# EAGLE board SparkFun_FreeSoC2_Panel_v14 (EAGLE 7.5.0), part 1 of 6
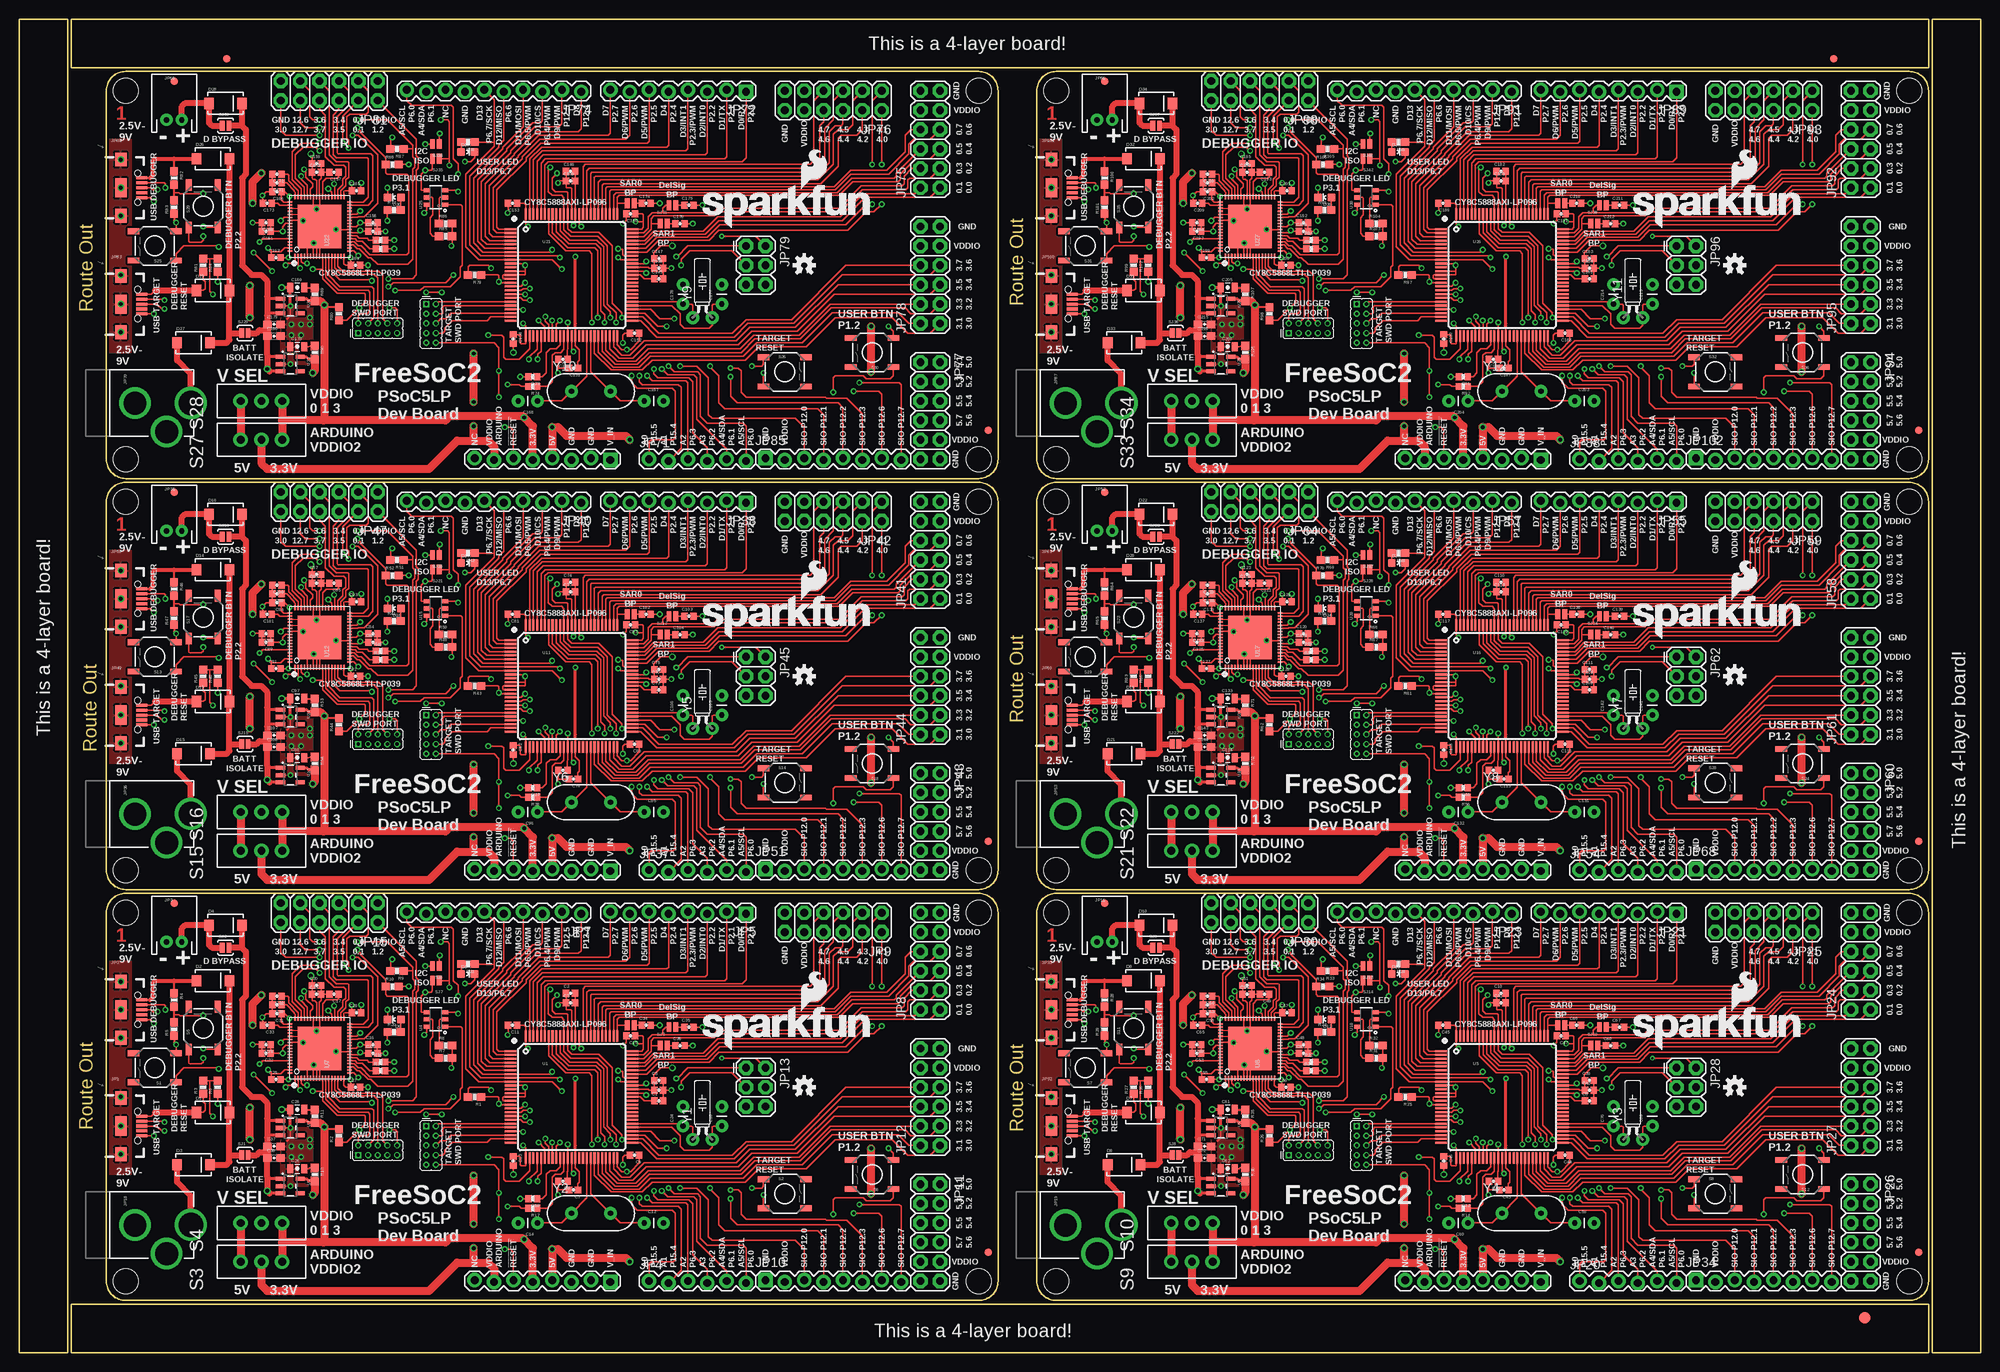
[diagram p0: board, top side]
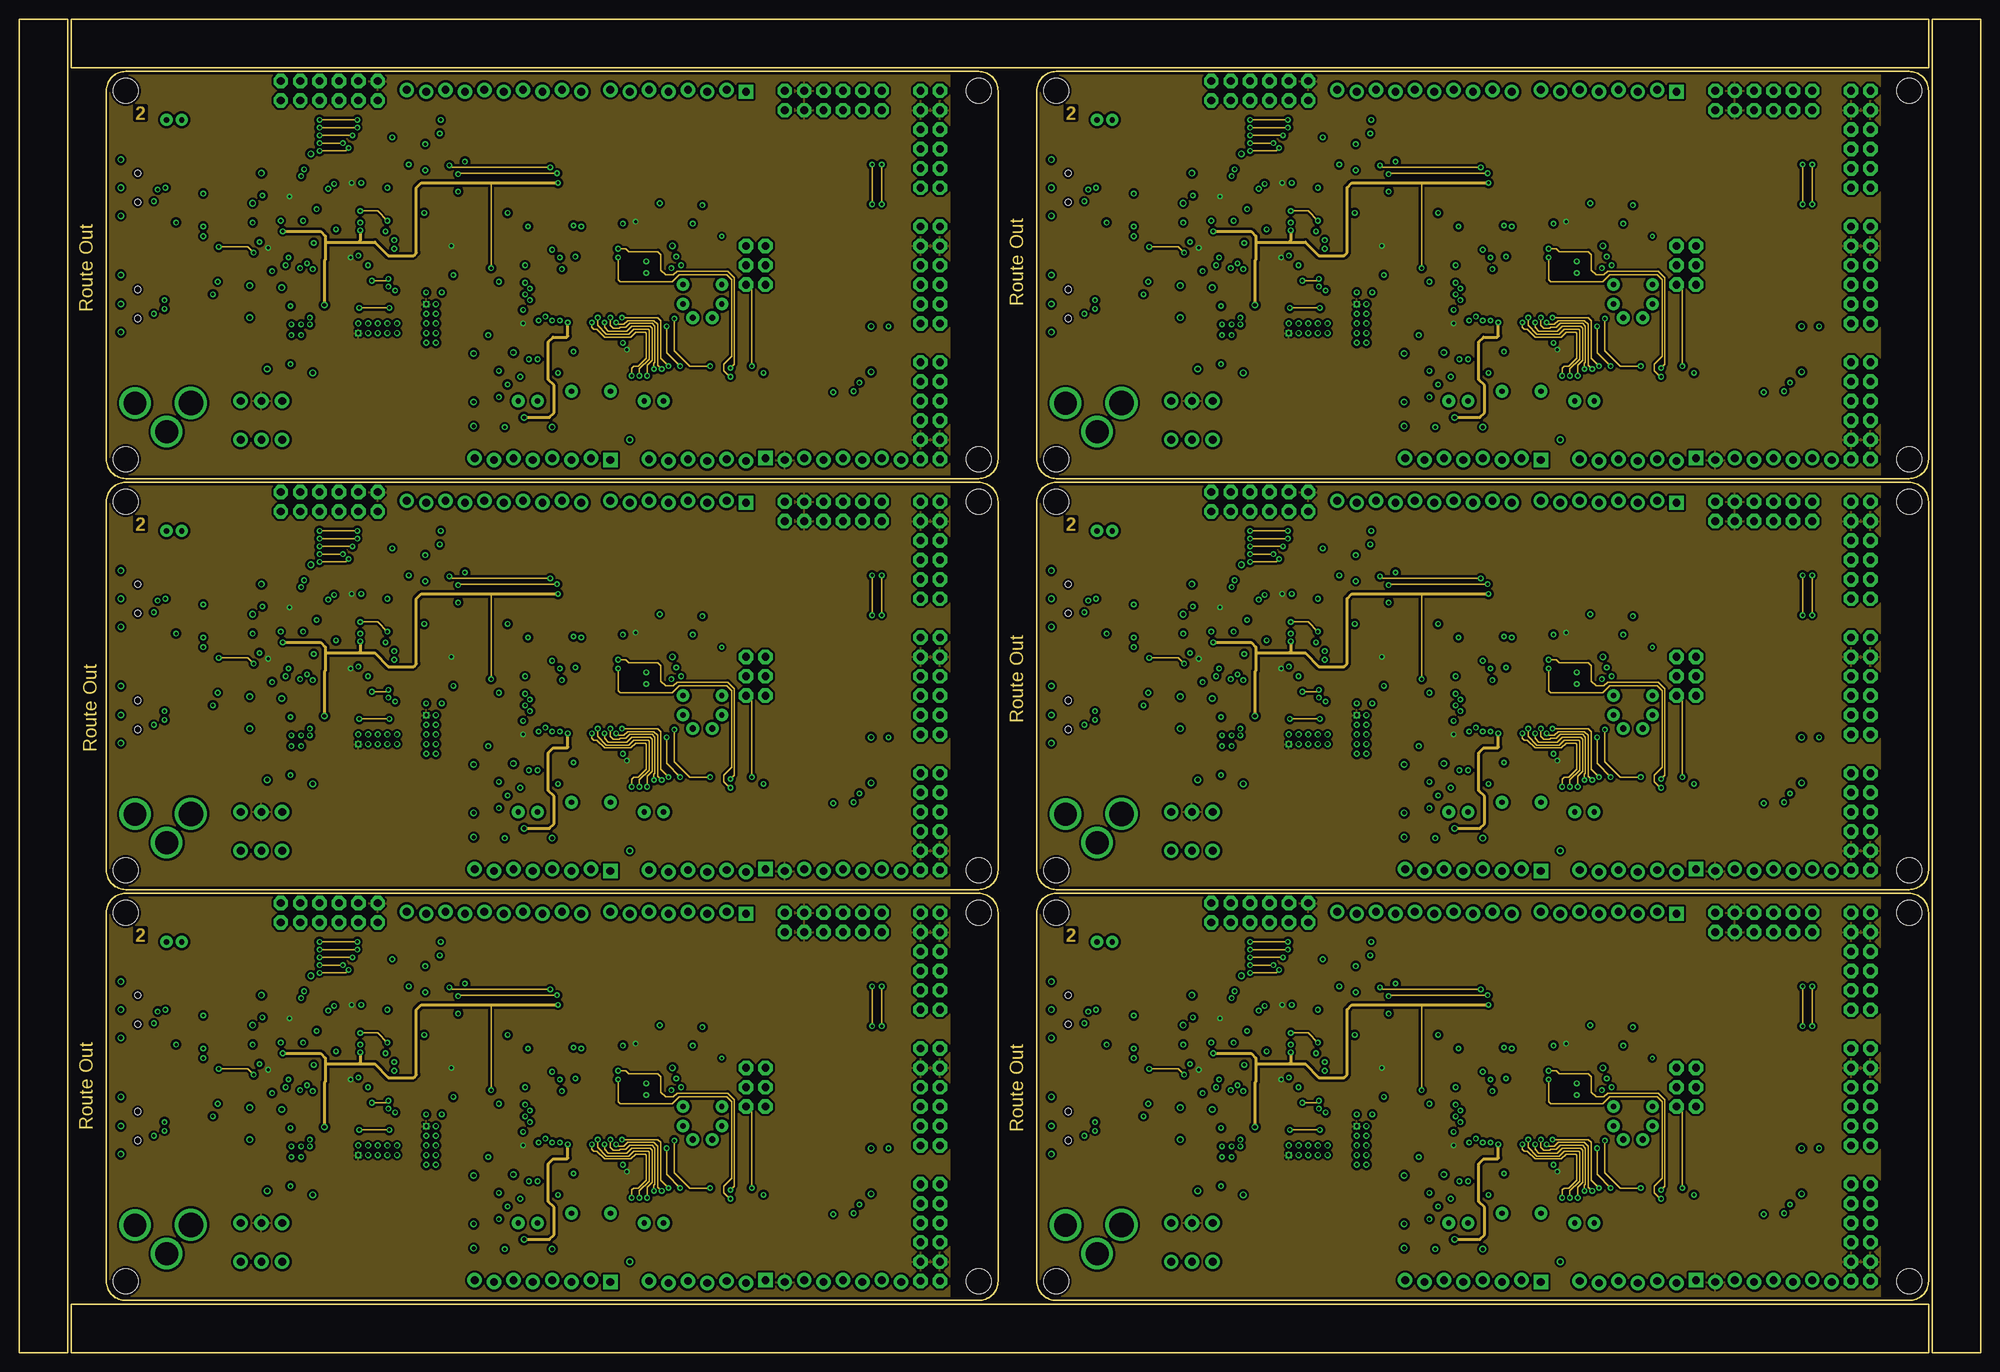
[diagram p1: board, inner layer Route2]
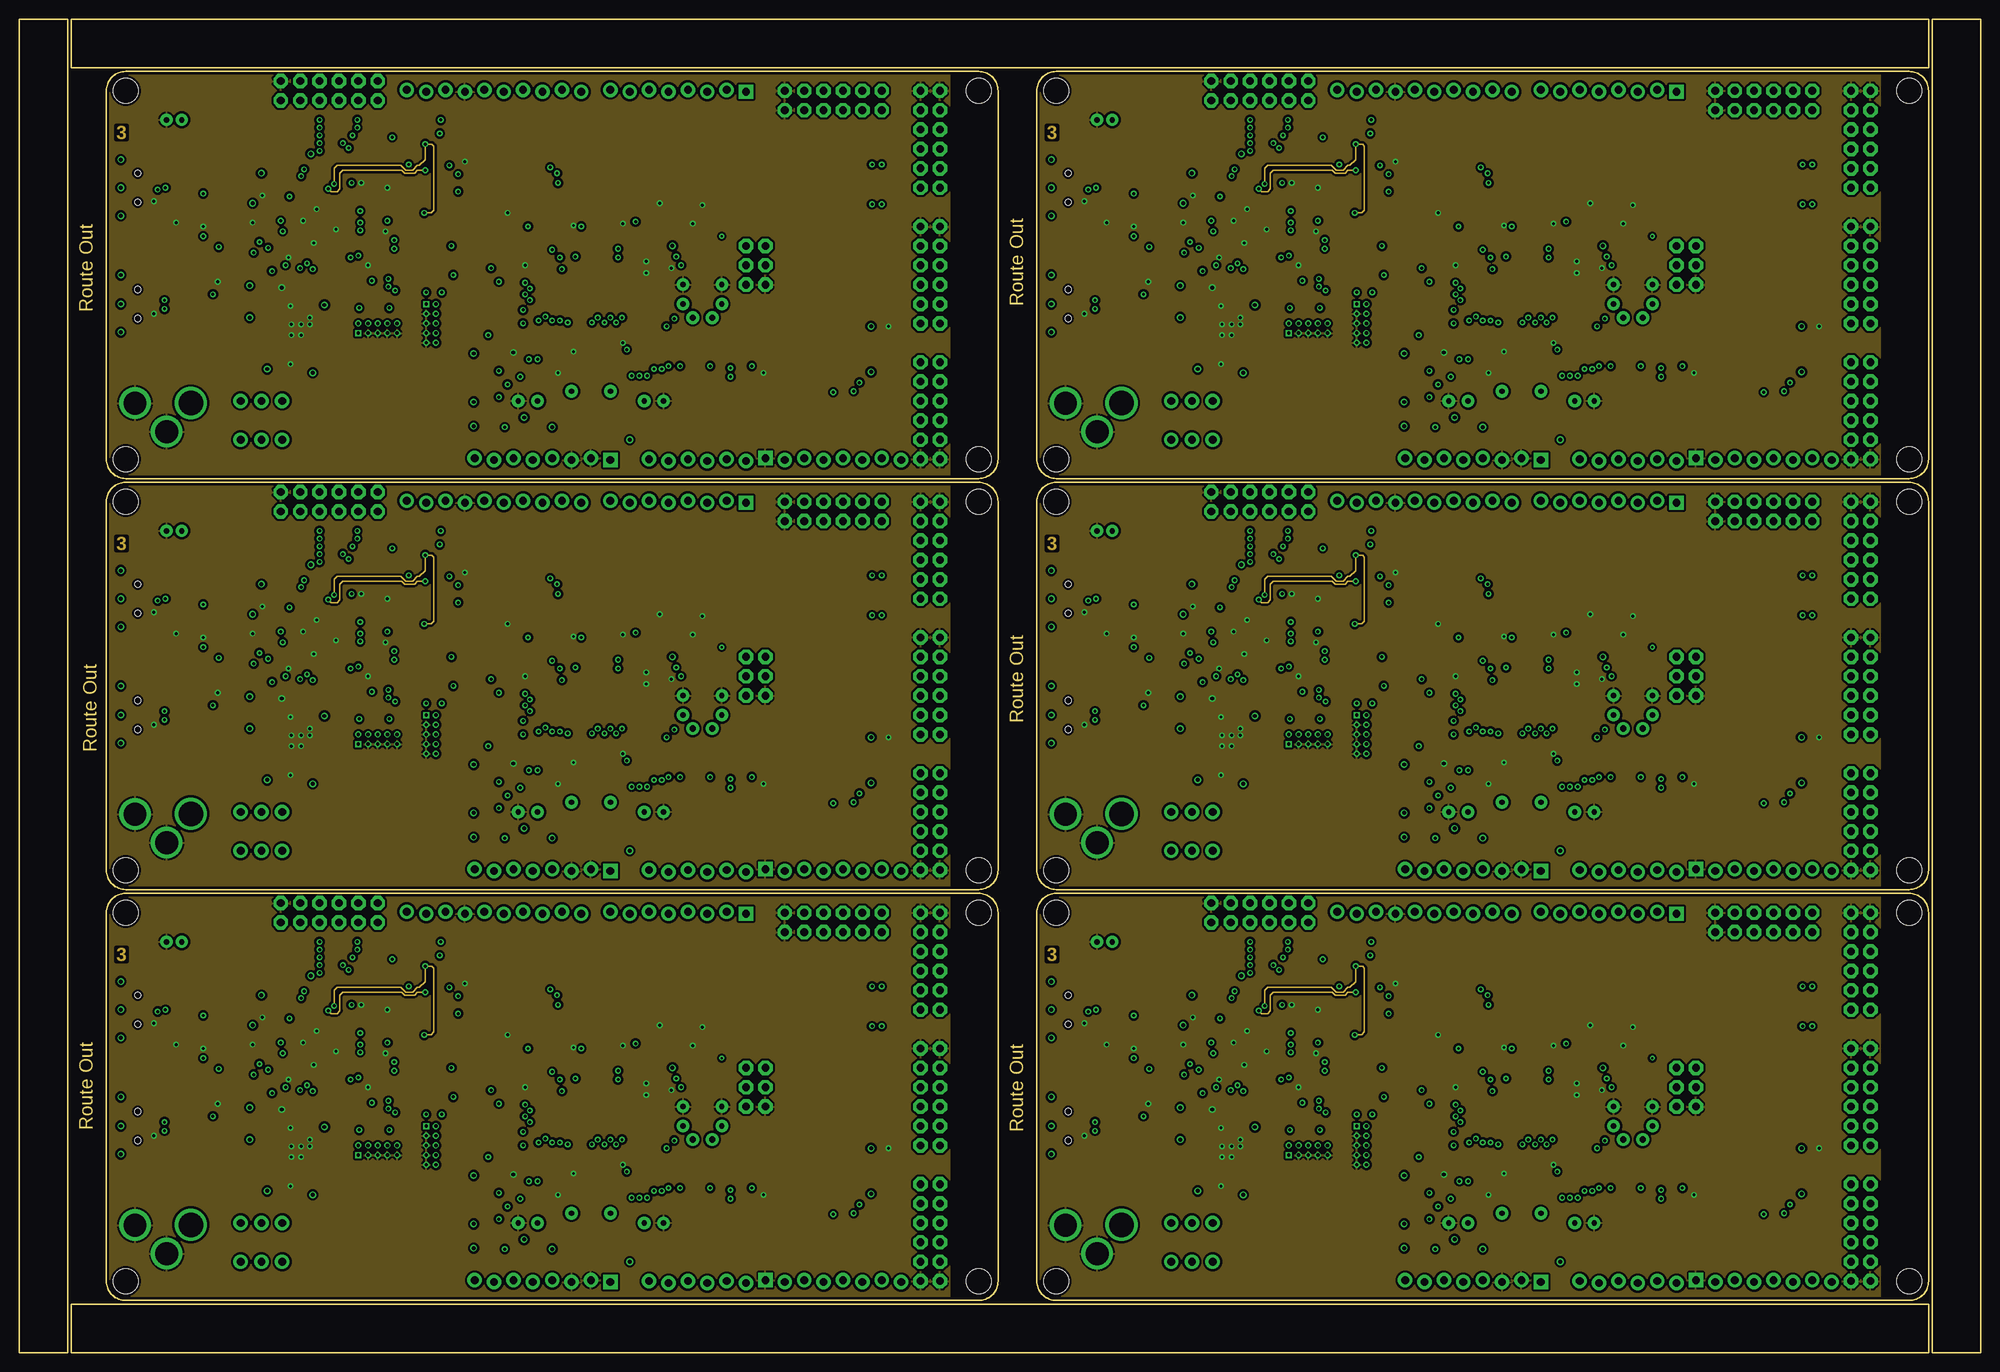
[diagram p2: board, inner layer Route15]
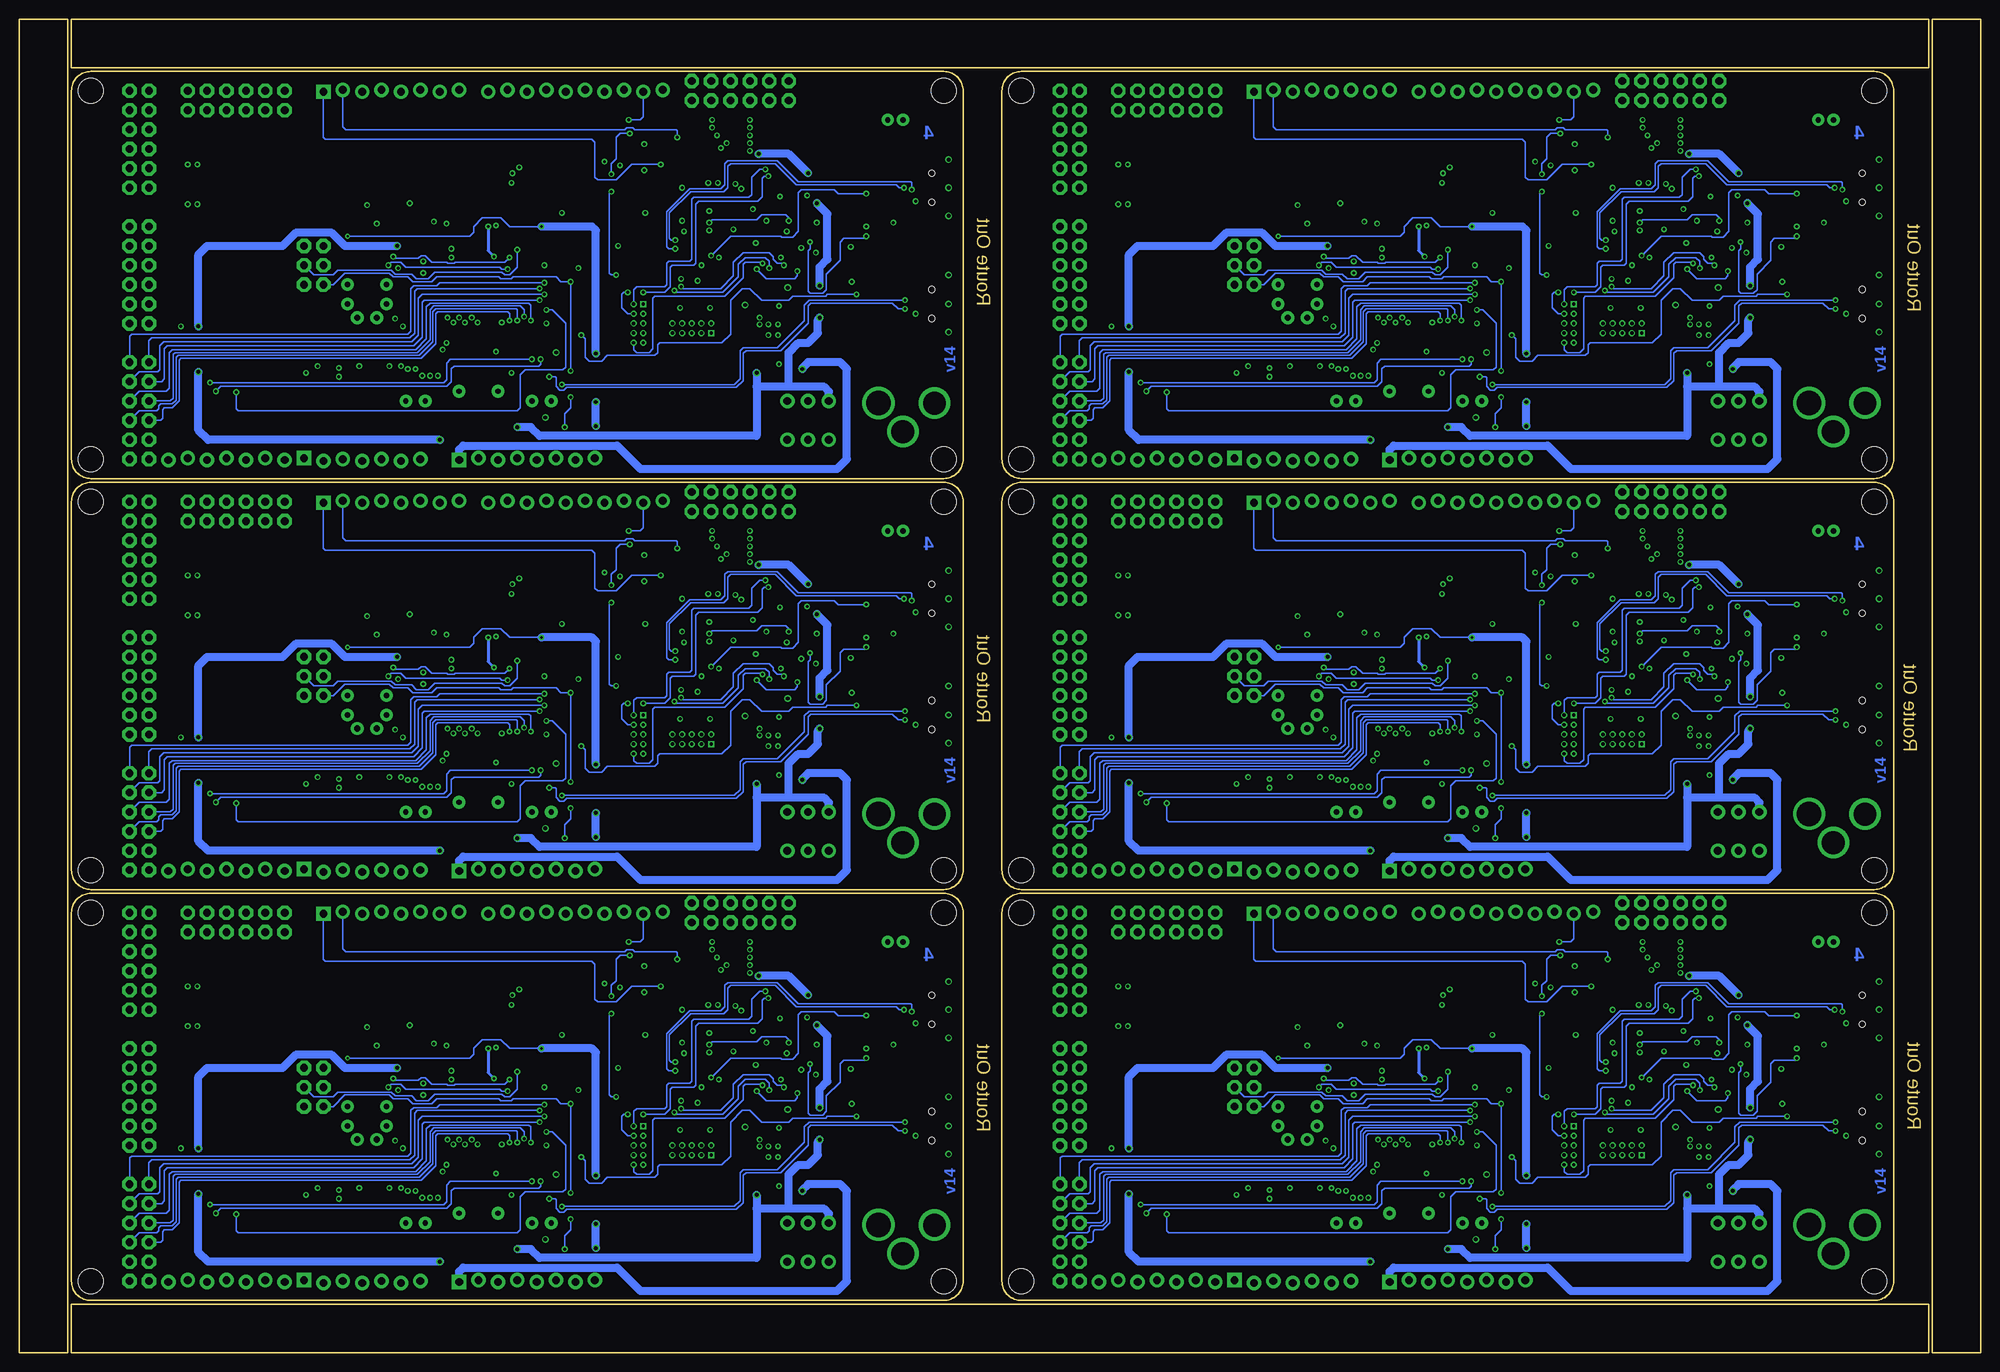
[diagram p3: board, bottom side, seen from below]

Size 257.05 x 174.75 mm. Coordinates in mm from the lower left corner, seen from the top.
Outline: 6.35,79.25 6.35,0 0,0 0,29.72
Outline: 0,27.18 0,174.75 6.35,174.75 6.35,76.71
Outline: 83.82,0 6.86,0 6.86,6.35 34.29,6.35
Outline: 31.75,6.35 250.19,6.35 250.19,0 81.28,0
Outline: 257.05,79.25 257.05,0 250.7,0 250.7,29.72
Outline: 250.7,27.18 250.7,174.75 257.05,174.75 257.05,76.71
Outline: 177.8,174.75 250.19,174.75 250.19,168.4 227.33,168.4
Outline: 229.87,168.4 6.86,168.4 6.86,174.75 180.34,174.75
Outline: 125.73,6.86 13.97,6.86 arc-90 11.43,9.4 11.43,57.66 arc-90 13.97,60.2 125.73,60.2 arc-90 128.27,57.66 128.27,9.4 arc-90 125.73,6.86
Outline: 247.65,6.86 135.89,6.86 arc-90 133.35,9.4 133.35,57.66 arc-90 135.89,60.2 247.65,60.2 arc-90 250.19,57.66 250.19,9.4 arc-90 247.65,6.86
Outline: 125.73,60.71 13.97,60.71 arc-90 11.43,63.25 11.43,111.51 arc-90 13.97,114.05 125.73,114.05 arc-90 128.27,111.51 128.27,63.25 arc-90 125.73,60.71
Outline: 247.65,60.71 135.89,60.71 arc-90 133.35,63.25 133.35,111.51 arc-90 135.89,114.05 247.65,114.05 arc-90 250.19,111.51 250.19,63.25 arc-90 247.65,60.71
Outline: 125.73,114.55 13.97,114.55 arc-90 11.43,117.09 11.43,165.35 arc-90 13.97,167.89 125.73,167.89 arc-90 128.27,165.35 128.27,117.09 arc-90 125.73,114.55
Outline: 247.65,114.55 135.89,114.55 arc-90 133.35,117.09 133.35,165.35 arc-90 135.89,167.89 247.65,167.89 arc-90 250.19,165.35 250.19,117.09 arc-90 247.65,114.55
Copper layers (1*2*15*16): Top 0.035mm / dielectric 1.5mm / Route2 0.035mm / dielectric 0.15mm / Route15 0.035mm / dielectric 0.2mm / Bottom 0.035mm
Design rules "SparkFun-2-layer-TIGHT *": minimum track width 7mil, minimum drill 15mil, track to track 7mil, track to pad 7mil, pad to pad 7mil, via to via 7mil, smd to smd 7mil, copper to edge 7mil, drill to drill 7mil, minimum pad ring 7mil, minimum via ring 7mil, stop-mask expansion 4mil, vias tented up to drill 20mil, thermal gap 10mil
Net classes: 0 signal: width 0.178 mm, drill 0.381 mm, clearance 0.178 mm; 1 AVCC: width 0.508 mm, drill 0.508 mm, clearance 0.178 mm; 2 ARDUINO_VCC: width 0.508 mm, drill 0.381 mm

## Footprints (pad centres in the part's own frame; a part is rotated, then mirrored left to right if it is on the bottom)
0402-CAP = smd 0.85 x 0.9: 1 -0.58,0; 2 0.58,0
CAP-PTH-SMALL = drill 0.7 pad 1.651: 1 0,0; 2 2.54,0
0805-CAP = smd 0.8 x 1.2: 1 -0.9,0; 2 0.9,0
0603-CAP = smd 1.1 x 1: 1 -0.85,0; 2 0.85,0
SMA-DIODE = smd 1.27 x 1.47: A -2.15,0; C 2.15,0
LED-0603 = smd 1 x 1: A 0,-0.877; C 0,0.877
FIDUCIAL-1.5X3 = smd 1.5 x 1.5: 1 0,0
FIDUCIAL-1X2 = smd 1 x 1: 1 0,0
USB-B-MICRO-SMD_V03 = smd 1.45 x 0.4: D+1 2.725,0; D-1 2.725,0.65; GND1 2.725,-1.3; ID1 2.725,-0.65; VBUS1 2.725,1.3 | smd 1.5 x 1.8: SHIELD1 0,3.685; SHIELD2 0,-3.685 | smd 1.5 x 2.5: SHIELD3 0,0 | hole 0.85: 2.2,1.9; 2.2,-1.9
JST-2-PTH = drill 0.7 pad 1.6: 1 -1,0; 2 1,0
1X06-SIP_LOCK = drill 1.016 pad 1.88: 1 0,0; 2 2.54,-0.254; 3 5.08,0; 4 7.62,-0.254; 5 10.16,0; 6 12.7,-0.254
1X08_LOCK = drill 1.016 pad 1.88 square: 1 0,0.127 | drill 1.016 pad 1.88: 2 2.54,-0.127; 3 5.08,0.127; 4 7.62,-0.127; 5 10.16,0.127; 6 12.7,-0.127; 7 15.24,0.127; 8 17.78,-0.127
1X10_LOCK = drill 1.016 pad 1.88: 1 0,0.127; 2 2.54,-0.127; 3 5.08,0.127; 4 7.62,-0.127; 5 10.16,0.127; 6 12.7,-0.127; 7 15.24,0.127; 8 17.78,-0.127; 9 20.32,0.127; 10 22.86,-0.127
2X6 = drill 1.016 pad 1.88 octagon: 1 0,0; 2 0,2.54; 3 2.54,0; 4 2.54,2.54; 5 5.08,0; 6 5.08,2.54; 7 7.62,0; 8 7.62,2.54; 9 10.16,0; 10 10.16,2.54; 11 12.7,0; 12 12.7,2.54
2X3 = drill 1.016 pad 1.88 octagon: 1 0,0; 2 0,2.54; 3 2.54,0; 4 2.54,2.54; 5 5.08,0; 6 5.08,2.54
2X5_PTH_SILK_.05 = drill 0.432 square: 1 0,6.35 | drill 0.432: 2 1.27,6.35; 3 0,5.08; 4 1.27,5.08; 5 0,3.81; 6 1.27,3.81; 7 0,2.54; 8 1.27,2.54; 9 0,1.27; 10 1.27,1.27
POWER_JACK_PTH_LOCK = drill 2.997 pad 4.115: GND 0.025,6.557; GNDBREAK 3.762,10.7 | drill 3.2 pad 4.115: PWR 0,13.878
0603-RES = smd 1.1 x 1: 1 -0.85,0; 2 0.85,0
0603-RES@1 = smd 1.1 x 1: 1 -0.85,0; 2 0.85,0
0402-RES = smd 0.85 x 0.9: 1 -0.58,0; 2 0.58,0
TACTILE-SWITCH-SMD = smd 1.524 x 0.762: 1 -2.794,1.905; 2 2.794,1.905; 3 -2.794,-1.905; 4 2.794,-1.905
SWITCH-SPDT_LOCK.007S = drill 1.016 pad 1.88: 1 0,2.718; 2 0,0; 3 0,-2.718
PAD-JUMPER-2-NC_BY_PASTE_YES_SILK = smd 0.635 x 1.27: 1 -0.401,0; 2 0.413,0
PAD-JUMPER-2-NO_YES_SILK = smd 0.635 x 1.27: 1 -0.45,0; 2 0.45,0
PAD-JUMPER-2-NO_NO_SILK = smd 0.635 x 1.27: 1 -0.45,0; 2 0.45,0
STAND-OFF = hole 3.302: 0,0
TQFP-100-14X14MM = smd 1.5 x 0.27: 1 -8,6; 2 -8,5.5; 3 -8,5; 4 -8,4.5; 5 -8,4; 6 -8,3.5; 7 -8,3; 8 -8,2.5; 9 -8,2; 10 -8,1.5; 11 -8,1; 12 -8,0.5; 13 -8,0; 14 -8,-0.5; 15 -8,-1; 16 -8,-1.5; 17 -8,-2; 18 -8,-2.5; 19 -8,-3; 20 -8,-3.5; 21 -8,-4; 22 -8,-4.5; 23 -8,-5; 24 -8,-5.5; 25 -8,-6; 51 8,-6; 52 8,-5.5; 53 8,-5; 54 8,-4.5; 55 8,-4; 56 8,-3.5; 57 8,-3; 58 8,-2.5; 59 8,-2; 60 8,-1.5; 61 8,-1; 62 8,-0.5; 63 8,0; 64 8,0.5; 65 8,1; 66 8,1.5; 67 8,2; 68 8,2.5; 69 8,3; 70 8,3.5; 71 8,4; 72 8,4.5; 73 8,5; 74 8,5.5; 75 8,6 | smd 0.27 x 1.5: 26 -6,-8; 27 -5.5,-8; 28 -5,-8; 29 -4.5,-8; 30 -4,-8; 31 -3.5,-8; 32 -3,-8; 33 -2.5,-8; 34 -2,-8; 35 -1.5,-8; 36 -1,-8; 37 -0.5,-8; 38 0,-8; 39 0.5,-8; 40 1,-8; 41 1.5,-8; 42 2,-8; 43 2.5,-8; 44 3,-8; 45 3.5,-8; 46 4,-8; 47 4.5,-8; 48 5,-8; 49 5.5,-8; 50 6,-8; 76 6,8; 77 5.5,8; 78 5,8; 79 4.5,8; 80 4,8; 81 3.5,8; 82 3,8; 83 2.5,8; 84 2,8; 85 1.5,8; 86 1,8; 87 0.5,8; 88 0,8; 89 -0.5,8; 90 -1,8; 91 -1.5,8; 92 -2,8; 93 -2.5,8; 94 -3,8; 95 -3.5,8; 96 -4,8; 97 -4.5,8; 98 -5,8; 99 -5.5,8; 100 -6,8
SOT23-5 = smd 0.55 x 1.2: 1 -0.95,-1.3; 2 0,-1.3; 3 0.95,-1.3; 4 0.95,1.3; 5 -0.95,1.3
SOT26 = smd 0.55 x 0.8: D1 -0.95,1.2; D2 0.95,1.2; G1 -0.95,-1.2; G2 0.95,-1.2; S1 0,1.2; S2 0,-1.2
QFN-68 = smd 0.6 x 0.2: 1 -3.9,3.2; 2 -3.9,2.8; 3 -3.9,2.4; 4 -3.9,2; 5 -3.9,1.6; 6 -3.9,1.2; 7 -3.9,0.8; 8 -3.9,0.4; 9 -3.9,0; 10 -3.9,-0.4; 11 -3.9,-0.8; 12 -3.9,-1.2; 13 -3.9,-1.6; 14 -3.9,-2; 15 -3.9,-2.4; 16 -3.9,-2.8; 17 -3.9,-3.2; 35 3.9,-3.2; 36 3.9,-2.8; 37 3.9,-2.4; 38 3.9,-2; 39 3.9,-1.6; 40 3.9,-1.2; 41 3.9,-0.8; 42 3.9,-0.4; 43 3.9,0; 44 3.9,0.4; 45 3.9,0.8; 46 3.9,1.2; 47 3.9,1.6; 48 3.9,2; 49 3.9,2.4; 50 3.9,2.8; 51 3.9,3.2 | smd 0.2 x 0.6: 18 -3.2,-3.9; 19 -2.8,-3.9; 20 -2.4,-3.9; 21 -2,-3.9; 22 -1.6,-3.9; 23 -1.2,-3.9; 24 -0.8,-3.9; 25 -0.4,-3.9; 26 0,-3.9; 27 0.4,-3.9; 28 0.8,-3.9; 29 1.2,-3.9; 30 1.6,-3.9; 31 2,-3.9; 32 2.4,-3.9; 33 2.8,-3.9; 34 3.2,-3.9; 52 3.2,3.9; 53 2.8,3.9; 54 2.4,3.9; 55 2,3.9; 56 1.6,3.9; 57 1.2,3.9; 58 0.8,3.9; 59 0.4,3.9; 60 0,3.9; 61 -0.4,3.9; 62 -0.8,3.9; 63 -1.2,3.9; 64 -1.6,3.9; 65 -2,3.9; 66 -2.4,3.9; 67 -2.8,3.9; 68 -3.2,3.9 | smd 5.7 x 5.7: 69 0,0
TC26H = drill 0.813 pad 1.676: 1 -1.27,0; 2 1.27,0
HC49US = drill 0.7 pad 1.651: 1 -2.54,0; 2 2.54,0

## Placement (x,y rotation side)
C1  1.0uF  [0402-CAP]  83.82,33.02 0 top
C2  1.0uF  [0402-CAP]  72.26,47.12 0 top
C3  0.1uF  [0402-CAP]  72.26,45.85 0 top
C4  1.0uF  [0402-CAP]  71.25,22.48 180 top
C5  1.0uF  [0402-CAP]  83.82,35.69 0 top
C6  0.1uF  [0402-CAP]  83.82,34.42 0 top
C7  1.0uF  [0402-CAP]  72.64,21.34 180 top
C8  1.0uF  [0402-CAP]  205.74,33.02 0 top
C9  0.1uF  [0402-CAP]  80.64,25.91 180 top
C10  1.0uF  [0402-CAP]  194.18,47.12 0 top
C11  0.1uF  [0402-CAP]  64.64,42.93 180 top
C12  [CAP-PTH-SMALL]  81.92,17.02 0 top
C13  0.1uF  [0402-CAP]  64.77,25.15 270 top
C14  [CAP-PTH-SMALL]  67.94,17.02 180 top
C15  0.1uF  [0402-CAP]  80.14,41.53 180 top
C16  1.0uF  [0402-CAP]  46.35,40.39 0 top
C17  1.0uF  [0402-CAP]  41.27,46.99 180 top
C18  [CAP-PTH-SMALL]  92.08,29.72 90 top
C19  1.0uF  [0402-CAP]  32.38,40.39 180 top
C20  1.0uF  [0402-CAP]  38.99,48.13 0 top
C21  0.1uF  [0402-CAP]  46.35,39.24 0 top
C22  0.1uF  [0402-CAP]  32.38,39.24 180 top
C23  0.1uF  [0402-CAP]  38.99,46.99 0 top
C24  [CAP-PTH-SMALL]  87,29.72 90 top
C25  0.1uF  [0402-CAP]  33.66,35.81 0 top
C26  10uF  [0805-CAP]  36.45,31.88 0 top
C27  0.1uF  [0402-CAP]  44.07,34.8 0 top
C28  10uF  [0805-CAP]  36.45,24.13 0 top
C29  0.1uF  [0402-CAP]  44.2,44.58 0 top
C30  0.1uF  [0402-CAP]  33.78,45.59 180 top
C31  0.1uF  [0402-CAP]  33.78,44.45 180 top
C32  0.1uF  [0402-CAP]  33.78,46.74 180 top
C33  0.1uF  [0402-CAP]  32.51,42.93 180 top
C34  0.1uF  [0402-CAP]  82.17,42.93 0 top
C35  0.1uF  [0402-CAP]  87.76,42.67 0 top
C36  0.1uF  [0402-CAP]  86.61,40.26 0 top
C37  1.0uF  [0603-CAP]  33.4,27.05 0 top
C38  0.1uF  [0603-CAP]  33.4,25.53 0 top
C39  1.0uF  [0402-CAP]  205.74,35.69 0 top
C40  0.1uF  [0402-CAP]  205.74,34.42 0 top
C41  0.1uF  [0402-CAP]  194.18,45.85 0 top
C42  1.0uF  [0402-CAP]  193.17,22.48 180 top
C43  1.0uF  [0402-CAP]  194.56,21.34 180 top
C44  0.1uF  [0402-CAP]  202.56,25.91 180 top
C45  0.1uF  [0402-CAP]  186.56,42.93 180 top
C46  0.1uF  [0402-CAP]  186.69,25.15 270 top
C47  0.1uF  [0402-CAP]  202.06,41.53 180 top
C48  1.0uF  [0402-CAP]  168.28,40.39 0 top
C49  1.0uF  [0402-CAP]  163.19,46.99 180 top
C50  1.0uF  [0402-CAP]  154.31,40.39 180 top
C51  1.0uF  [0402-CAP]  160.91,48.13 0 top
C52  0.1uF  [0402-CAP]  168.28,39.24 0 top
C53  0.1uF  [0402-CAP]  154.31,39.24 180 top
C54  0.1uF  [0402-CAP]  160.91,46.99 0 top
C55  0.1uF  [0402-CAP]  155.57,35.81 0 top
C56  0.1uF  [0402-CAP]  165.99,34.8 0 top
C57  0.1uF  [0402-CAP]  166.12,44.58 0 top
C58  0.1uF  [0402-CAP]  155.7,44.45 180 top
C59  [CAP-PTH-SMALL]  203.84,17.02 0 top
C60  [CAP-PTH-SMALL]  189.87,17.02 180 top
C61  10uF  [0805-CAP]  158.37,31.88 0 top
C62  10uF  [0805-CAP]  158.37,24.13 0 top
C63  0.1uF  [0402-CAP]  155.7,45.59 180 top
C64  0.1uF  [0402-CAP]  155.7,46.74 180 top
C65  0.1uF  [0402-CAP]  154.43,42.93 180 top
C66  0.1uF  [0402-CAP]  204.09,42.93 0 top
C67  0.1uF  [0402-CAP]  209.68,42.67 0 top
C68  0.1uF  [0402-CAP]  208.53,40.26 0 top
C69  [CAP-PTH-SMALL]  214,29.72 90 top
C70  [CAP-PTH-SMALL]  208.91,29.72 90 top
C71  1.0uF  [0603-CAP]  155.32,27.05 0 top
C72  0.1uF  [0603-CAP]  155.32,25.53 0 top
C73  1.0uF  [0402-CAP]  83.82,86.87 0 top
C74  1.0uF  [0402-CAP]  72.26,100.97 0 top
C75  1.0uF  [0402-CAP]  83.82,89.53 0 top
C76  0.1uF  [0402-CAP]  83.82,88.27 0 top
C77  0.1uF  [0402-CAP]  72.26,99.69 0 top
C78  1.0uF  [0402-CAP]  71.25,76.33 180 top
C79  1.0uF  [0402-CAP]  72.64,75.18 180 top
C80  0.1uF  [0402-CAP]  80.64,79.76 180 top
C81  0.1uF  [0402-CAP]  64.64,96.77 180 top
C82  0.1uF  [0402-CAP]  64.77,78.99 270 top
C83  0.1uF  [0402-CAP]  80.14,95.38 180 top
C84  1.0uF  [0402-CAP]  46.35,94.23 0 top
C85  1.0uF  [0402-CAP]  41.27,100.84 180 top
C86  1.0uF  [0402-CAP]  32.38,94.23 180 top
C87  1.0uF  [0402-CAP]  38.99,101.98 0 top
C88  0.1uF  [0402-CAP]  46.35,93.09 0 top
C89  0.1uF  [0402-CAP]  32.38,93.09 180 top
C90  0.1uF  [0402-CAP]  38.99,100.84 0 top
C91  0.1uF  [0402-CAP]  33.66,89.66 0 top
C92  0.1uF  [0402-CAP]  44.07,88.65 0 top
C93  0.1uF  [0402-CAP]  44.2,98.42 0 top
C94  0.1uF  [0402-CAP]  33.78,98.3 180 top
C95  [CAP-PTH-SMALL]  81.92,70.87 0 top
C96  [CAP-PTH-SMALL]  67.94,70.87 180 top
C97  10uF  [0805-CAP]  36.45,85.72 0 top
C98  10uF  [0805-CAP]  36.45,77.98 0 top
C99  0.1uF  [0402-CAP]  33.78,99.44 180 top
C100  0.1uF  [0402-CAP]  33.78,100.58 180 top
C101  0.1uF  [0402-CAP]  32.51,96.77 180 top
C102  0.1uF  [0402-CAP]  82.17,96.77 0 top
C103  0.1uF  [0402-CAP]  87.76,96.52 0 top
C104  0.1uF  [0402-CAP]  86.61,94.11 0 top
C105  [CAP-PTH-SMALL]  92.08,83.57 90 top
C106  [CAP-PTH-SMALL]  87,83.57 90 top
C107  1.0uF  [0603-CAP]  33.4,80.9 0 top
C108  0.1uF  [0603-CAP]  33.4,79.38 0 top
C109  1.0uF  [0402-CAP]  205.74,86.87 0 top
C110  1.0uF  [0402-CAP]  194.18,100.97 0 top
C111  1.0uF  [0402-CAP]  205.74,89.53 0 top
C112  0.1uF  [0402-CAP]  205.74,88.27 0 top
C113  0.1uF  [0402-CAP]  194.18,99.69 0 top
C114  1.0uF  [0402-CAP]  193.17,76.33 180 top
C115  1.0uF  [0402-CAP]  194.56,75.18 180 top
C116  0.1uF  [0402-CAP]  202.56,79.76 180 top
C117  0.1uF  [0402-CAP]  186.56,96.77 180 top
C118  0.1uF  [0402-CAP]  186.69,78.99 270 top
C119  0.1uF  [0402-CAP]  202.06,95.38 180 top
C120  1.0uF  [0402-CAP]  168.28,94.23 0 top
C121  1.0uF  [0402-CAP]  163.19,100.84 180 top
C122  1.0uF  [0402-CAP]  154.31,94.23 180 top
C123  1.0uF  [0402-CAP]  160.91,101.98 0 top
C124  0.1uF  [0402-CAP]  168.28,93.09 0 top
C125  0.1uF  [0402-CAP]  154.31,93.09 180 top
C126  0.1uF  [0402-CAP]  160.91,100.84 0 top
C127  0.1uF  [0402-CAP]  155.57,89.66 0 top
C128  0.1uF  [0402-CAP]  165.99,88.65 0 top
C129  0.1uF  [0402-CAP]  166.12,98.42 0 top
C130  0.1uF  [0402-CAP]  155.7,98.3 180 top
C131  [CAP-PTH-SMALL]  203.84,70.87 0 top
C132  [CAP-PTH-SMALL]  189.87,70.87 180 top
C133  10uF  [0805-CAP]  158.37,85.72 0 top
C134  10uF  [0805-CAP]  158.37,77.98 0 top
C135  0.1uF  [0402-CAP]  155.7,99.44 180 top
C136  0.1uF  [0402-CAP]  155.7,100.58 180 top
C137  0.1uF  [0402-CAP]  154.43,96.77 180 top
C138  0.1uF  [0402-CAP]  204.09,96.77 0 top
C139  0.1uF  [0402-CAP]  209.68,96.52 0 top
C140  0.1uF  [0402-CAP]  208.53,94.11 0 top
C141  [CAP-PTH-SMALL]  214,83.57 90 top
C142  [CAP-PTH-SMALL]  208.91,83.57 90 top
C143  1.0uF  [0603-CAP]  155.32,80.9 0 top
C144  0.1uF  [0603-CAP]  155.32,79.38 0 top
C145  1.0uF  [0402-CAP]  83.82,140.72 0 top
C146  1.0uF  [0402-CAP]  72.26,154.81 0 top
C147  1.0uF  [0402-CAP]  83.82,143.38 0 top
C148  0.1uF  [0402-CAP]  83.82,142.11 0 top
C149  0.1uF  [0402-CAP]  72.26,153.54 0 top
C150  1.0uF  [0402-CAP]  71.25,130.18 180 top
C151  1.0uF  [0402-CAP]  72.64,129.03 180 top
C152  0.1uF  [0402-CAP]  80.64,133.6 180 top
C153  0.1uF  [0402-CAP]  64.64,150.62 180 top
C154  0.1uF  [0402-CAP]  64.77,132.84 270 top
C155  0.1uF  [0402-CAP]  80.14,149.22 180 top
C156  1.0uF  [0402-CAP]  46.35,148.08 0 top
C157  1.0uF  [0402-CAP]  41.27,154.69 180 top
C158  1.0uF  [0402-CAP]  32.38,148.08 180 top
C159  1.0uF  [0402-CAP]  38.99,155.83 0 top
C160  0.1uF  [0402-CAP]  46.35,146.94 0 top
C161  0.1uF  [0402-CAP]  32.38,146.94 180 top
C162  0.1uF  [0402-CAP]  38.99,154.69 0 top
C163  0.1uF  [0402-CAP]  33.66,143.51 0 top
C164  0.1uF  [0402-CAP]  44.07,142.49 0 top
C165  0.1uF  [0402-CAP]  44.2,152.27 0 top
C166  0.1uF  [0402-CAP]  33.78,152.15 180 top
C167  [CAP-PTH-SMALL]  81.92,124.71 0 top
C168  [CAP-PTH-SMALL]  67.94,124.71 180 top
C169  10uF  [0805-CAP]  36.45,139.57 0 top
C170  10uF  [0805-CAP]  36.45,131.83 0 top
C171  0.1uF  [0402-CAP]  33.78,153.29 180 top
C172  0.1uF  [0402-CAP]  33.78,154.43 180 top
C173  0.1uF  [0402-CAP]  32.51,150.62 180 top
C174  0.1uF  [0402-CAP]  82.17,150.62 0 top
C175  0.1uF  [0402-CAP]  87.76,150.37 0 top
C176  0.1uF  [0402-CAP]  86.61,147.96 0 top
C177  [CAP-PTH-SMALL]  92.08,137.41 90 top
C178  [CAP-PTH-SMALL]  87,137.41 90 top
C179  1.0uF  [0603-CAP]  33.4,134.75 0 top
C180  0.1uF  [0603-CAP]  33.4,133.22 0 top
C181  1.0uF  [0402-CAP]  205.74,140.72 0 top
C182  1.0uF  [0402-CAP]  194.18,154.81 0 top
C183  1.0uF  [0402-CAP]  205.74,143.38 0 top
C184  0.1uF  [0402-CAP]  205.74,142.11 0 top
C185  0.1uF  [0402-CAP]  194.18,153.54 0 top
C186  1.0uF  [0402-CAP]  193.17,130.18 180 top
C187  1.0uF  [0402-CAP]  194.56,129.03 180 top
C188  0.1uF  [0402-CAP]  202.56,133.6 180 top
C189  0.1uF  [0402-CAP]  186.56,150.62 180 top
C190  0.1uF  [0402-CAP]  186.69,132.84 270 top
C191  0.1uF  [0402-CAP]  202.06,149.22 180 top
C192  1.0uF  [0402-CAP]  168.28,148.08 0 top
C193  1.0uF  [0402-CAP]  163.19,154.69 180 top
C194  1.0uF  [0402-CAP]  154.31,148.08 180 top
C195  1.0uF  [0402-CAP]  160.91,155.83 0 top
C196  0.1uF  [0402-CAP]  168.28,146.94 0 top
C197  0.1uF  [0402-CAP]  154.31,146.94 180 top
C198  0.1uF  [0402-CAP]  160.91,154.69 0 top
C199  0.1uF  [0402-CAP]  155.57,143.51 0 top
C200  0.1uF  [0402-CAP]  165.99,142.49 0 top
C201  0.1uF  [0402-CAP]  166.12,152.27 0 top
C202  0.1uF  [0402-CAP]  155.7,152.15 180 top
C203  [CAP-PTH-SMALL]  203.84,124.71 0 top
C204  [CAP-PTH-SMALL]  189.87,124.71 180 top
C205  10uF  [0805-CAP]  158.37,139.57 0 top
C206  10uF  [0805-CAP]  158.37,131.83 0 top
C207  0.1uF  [0402-CAP]  155.7,153.29 180 top
C208  0.1uF  [0402-CAP]  155.7,154.43 180 top
C209  0.1uF  [0402-CAP]  154.43,150.62 180 top
C210  0.1uF  [0402-CAP]  204.09,150.62 0 top
C211  0.1uF  [0402-CAP]  209.68,150.37 0 top
C212  0.1uF  [0402-CAP]  208.53,147.96 0 top
C213  [CAP-PTH-SMALL]  214,137.41 90 top
C214  [CAP-PTH-SMALL]  208.91,137.41 90 top
C215  1.0uF  [0603-CAP]  155.32,134.75 0 top
C216  0.1uF  [0603-CAP]  155.32,133.22 0 top
D1  MBRA140  [SMA-DIODE]  25.4,31.5 0 top
D2  MBRA140  [SMA-DIODE]  25.4,48.77 0 top
D3  MBRA140  [SMA-DIODE]  22.86,24.64 0 top
D4  MBRA140  [SMA-DIODE]  27.05,56.01 0 top
D5  RED  [LED-0603]  58.8,49.66 270 top
D6  RED  [LED-0603]  49.15,43.69 90 top
D7  MBRA140  [SMA-DIODE]  147.32,31.5 0 top
D8  MBRA140  [SMA-DIODE]  147.32,48.77 0 top
D9  MBRA140  [SMA-DIODE]  144.78,24.64 0 top
D10  MBRA140  [SMA-DIODE]  148.97,56.01 0 top
D11  RED  [LED-0603]  180.72,49.66 270 top
D12  RED  [LED-0603]  171.07,43.69 90 top
D13  MBRA140  [SMA-DIODE]  25.4,85.34 0 top
D14  MBRA140  [SMA-DIODE]  25.4,102.62 0 top
D15  MBRA140  [SMA-DIODE]  22.86,78.49 0 top
D16  MBRA140  [SMA-DIODE]  27.05,109.86 0 top
D17  RED  [LED-0603]  58.8,103.5 270 top
D18  RED  [LED-0603]  49.15,97.54 90 top
D19  MBRA140  [SMA-DIODE]  147.32,85.34 0 top
D20  MBRA140  [SMA-DIODE]  147.32,102.62 0 top
D21  MBRA140  [SMA-DIODE]  144.78,78.49 0 top
D22  MBRA140  [SMA-DIODE]  148.97,109.86 0 top
D23  RED  [LED-0603]  180.72,103.5 270 top
D24  RED  [LED-0603]  171.07,97.54 90 top
D25  MBRA140  [SMA-DIODE]  25.4,139.19 0 top
D26  MBRA140  [SMA-DIODE]  25.4,156.46 0 top
D27  MBRA140  [SMA-DIODE]  22.86,132.33 0 top
D28  MBRA140  [SMA-DIODE]  27.05,163.7 0 top
D29  RED  [LED-0603]  58.8,157.35 270 top
D30  RED  [LED-0603]  49.15,151.38 90 top
D31  MBRA140  [SMA-DIODE]  147.32,139.19 0 top
D32  MBRA140  [SMA-DIODE]  147.32,156.46 0 top
D33  MBRA140  [SMA-DIODE]  144.78,132.33 0 top
D34  MBRA140  [SMA-DIODE]  148.97,163.7 0 top
D35  RED  [LED-0603]  180.72,157.35 270 top
D36  RED  [LED-0603]  171.07,151.38 90 top
E$1  [FIDUCIAL-1.5X3]  241.81,4.57 0 top
E$7  [FIDUCIAL-1X2]  237.74,169.54 90 top
E$8  [FIDUCIAL-1X2]  27.18,169.54 270 top
FID1  FIDUCIAL1X2  [FIDUCIAL-1X2]  127,13.21 0 top
FID2  FIDUCIAL1X2  [FIDUCIAL-1X2]  20.32,58.93 0 top
FID3  FIDUCIAL1X2  [FIDUCIAL-1X2]  248.92,13.21 0 top
FID4  FIDUCIAL1X2  [FIDUCIAL-1X2]  142.24,58.93 0 top
FID5  FIDUCIAL1X2  [FIDUCIAL-1X2]  127,67.06 0 top
FID6  FIDUCIAL1X2  [FIDUCIAL-1X2]  20.32,112.78 0 top
FID7  FIDUCIAL1X2  [FIDUCIAL-1X2]  248.92,67.06 0 top
FID8  FIDUCIAL1X2  [FIDUCIAL-1X2]  142.24,112.78 0 top
FID9  FIDUCIAL1X2  [FIDUCIAL-1X2]  127,120.9 0 top
FID10  FIDUCIAL1X2  [FIDUCIAL-1X2]  20.32,166.62 0 top
FID11  FIDUCIAL1X2  [FIDUCIAL-1X2]  248.92,120.9 0 top
FID12  FIDUCIAL1X2  [FIDUCIAL-1X2]  142.24,166.62 0 top
JP1  MicroB  [USB-B-MICRO-SMD_V03]  13.34,29.72 0 top
JP2  MicroB  [USB-B-MICRO-SMD_V03]  13.34,44.96 0 top
JP3  [JST-2-PTH]  20.32,53.85 0 top
JP4  1X6 FEMALE PTH  [1X06-SIP_LOCK]  82.55,9.4 0 top
JP5  1X8 FEMALE PTH  [1X08_LOCK]  95.25,57.66 180 top
JP6  1X8 FEMALE PTH  [1X08_LOCK]  77.47,9.4 180 top
JP7  1X10 FEMALE PTH  [1X10_LOCK]  73.66,57.66 180 top
JP8  2X6 FEMALE  [2X6]  120.65,44.96 90 top
JP9  2X6 FEMALE  [2X6]  113.03,57.66 180 top
JP10  1x8 FEMALE PTH  [1X08_LOCK]  97.79,9.4 0 top
JP11  2X6 FEMALE  [2X6]  118.11,22.1 270 top
JP12  2X6 FEMALE  [2X6]  120.65,27.18 90 top
JP13  [2X3]  95.25,37.34 270 top
JP14  DNP  [2X5_PTH_SILK_.05]  50.8,25.91 90 top
JP15  2X6 FEMALE  [2X6]  46.99,58.93 180 top
JP16  [JST-2-PTH]  142.24,53.85 0 top
JP17  DNP  [2X5_PTH_SILK_.05]  53.34,23.37 0 top
JP18  POWER_JACKPTH_LOCK  [POWER_JACK_PTH_LOCK]  8.64,16.76 270 top
JP19  POWER_JACKPTH_LOCK  [POWER_JACK_PTH_LOCK]  130.56,16.76 270 top
JP20  1X6 FEMALE PTH  [1X06-SIP_LOCK]  204.47,9.4 0 top
JP21  1X8 FEMALE PTH  [1X08_LOCK]  217.17,57.66 180 top
JP22  1X8 FEMALE PTH  [1X08_LOCK]  199.39,9.4 180 top
JP23  1X10 FEMALE PTH  [1X10_LOCK]  195.58,57.66 180 top
JP24  2X6 FEMALE  [2X6]  242.57,44.96 90 top
JP25  2X6 FEMALE  [2X6]  234.95,57.66 180 top
JP26  2X6 FEMALE  [2X6]  240.03,22.1 270 top
JP27  2X6 FEMALE  [2X6]  242.57,27.18 90 top
JP28  [2X3]  217.17,37.34 270 top
JP29  DNP  [2X5_PTH_SILK_.05]  172.72,25.91 90 top
JP30  2X6 FEMALE  [2X6]  168.91,58.93 180 top
JP31  DNP  [2X5_PTH_SILK_.05]  175.26,23.37 0 top
JP32  MicroB  [USB-B-MICRO-SMD_V03]  135.25,29.72 0 top
JP33  MicroB  [USB-B-MICRO-SMD_V03]  135.25,44.96 0 top
JP34  1x8 FEMALE PTH  [1X08_LOCK]  219.71,9.4 0 top
JP35  [JST-2-PTH]  20.32,107.7 0 top
JP36  POWER_JACKPTH_LOCK  [POWER_JACK_PTH_LOCK]  8.64,70.61 270 top
JP37  1X6 FEMALE PTH  [1X06-SIP_LOCK]  82.55,63.25 0 top
JP38  1X8 FEMALE PTH  [1X08_LOCK]  95.25,111.51 180 top
JP39  1X8 FEMALE PTH  [1X08_LOCK]  77.47,63.25 180 top
JP40  1X10 FEMALE PTH  [1X10_LOCK]  73.66,111.51 180 top
JP41  2X6 FEMALE  [2X6]  120.65,98.81 90 top
JP42  2X6 FEMALE  [2X6]  113.03,111.51 180 top
JP43  2X6 FEMALE  [2X6]  118.11,75.95 270 top
JP44  2X6 FEMALE  [2X6]  120.65,81.03 90 top
JP45  [2X3]  95.25,91.19 270 top
JP46  DNP  [2X5_PTH_SILK_.05]  50.8,79.76 90 top
JP47  2X6 FEMALE  [2X6]  46.99,112.78 180 top
JP48  DNP  [2X5_PTH_SILK_.05]  53.34,77.22 0 top
JP49  MicroB  [USB-B-MICRO-SMD_V03]  13.34,83.57 0 top
JP50  MicroB  [USB-B-MICRO-SMD_V03]  13.34,98.81 0 top
JP51  1x8 FEMALE PTH  [1X08_LOCK]  97.79,63.25 0 top
JP52  [JST-2-PTH]  142.24,107.7 0 top
JP53  POWER_JACKPTH_LOCK  [POWER_JACK_PTH_LOCK]  130.56,70.61 270 top
JP54  1X6 FEMALE PTH  [1X06-SIP_LOCK]  204.47,63.25 0 top
JP55  1X8 FEMALE PTH  [1X08_LOCK]  217.17,111.51 180 top
JP56  1X8 FEMALE PTH  [1X08_LOCK]  199.39,63.25 180 top
JP57  1X10 FEMALE PTH  [1X10_LOCK]  195.58,111.51 180 top
JP58  2X6 FEMALE  [2X6]  242.57,98.81 90 top
JP59  2X6 FEMALE  [2X6]  234.95,111.51 180 top
JP60  2X6 FEMALE  [2X6]  240.03,75.95 270 top
JP61  2X6 FEMALE  [2X6]  242.57,81.03 90 top
JP62  [2X3]  217.17,91.19 270 top
JP63  DNP  [2X5_PTH_SILK_.05]  172.72,79.76 90 top
JP64  2X6 FEMALE  [2X6]  168.91,112.78 180 top
JP65  DNP  [2X5_PTH_SILK_.05]  175.26,77.22 0 top
JP66  MicroB  [USB-B-MICRO-SMD_V03]  135.25,83.57 0 top
JP67  MicroB  [USB-B-MICRO-SMD_V03]  135.25,98.81 0 top
JP68  1x8 FEMALE PTH  [1X08_LOCK]  219.71,63.25 0 top
JP69  [JST-2-PTH]  20.32,161.54 0 top
JP70  POWER_JACKPTH_LOCK  [POWER_JACK_PTH_LOCK]  8.64,124.46 270 top
JP71  1X6 FEMALE PTH  [1X06-SIP_LOCK]  82.55,117.09 0 top
JP72  1X8 FEMALE PTH  [1X08_LOCK]  95.25,165.35 180 top
JP73  1X8 FEMALE PTH  [1X08_LOCK]  77.47,117.09 180 top
JP74  1X10 FEMALE PTH  [1X10_LOCK]  73.66,165.35 180 top
JP75  2X6 FEMALE  [2X6]  120.65,152.65 90 top
JP76  2X6 FEMALE  [2X6]  113.03,165.35 180 top
JP77  2X6 FEMALE  [2X6]  118.11,129.79 270 top
JP78  2X6 FEMALE  [2X6]  120.65,134.87 90 top
JP79  [2X3]  95.25,145.03 270 top
JP80  DNP  [2X5_PTH_SILK_.05]  50.8,133.6 90 top
JP81  2X6 FEMALE  [2X6]  46.99,166.62 180 top
JP82  DNP  [2X5_PTH_SILK_.05]  53.34,131.06 0 top
JP83  MicroB  [USB-B-MICRO-SMD_V03]  13.34,137.41 0 top
JP84  MicroB  [USB-B-MICRO-SMD_V03]  13.34,152.65 0 top
JP85  1x8 FEMALE PTH  [1X08_LOCK]  97.79,117.09 0 top
JP86  [JST-2-PTH]  142.24,161.54 0 top
JP87  POWER_JACKPTH_LOCK  [POWER_JACK_PTH_LOCK]  130.56,124.46 270 top
JP88  1X6 FEMALE PTH  [1X06-SIP_LOCK]  204.47,117.09 0 top
JP89  1X8 FEMALE PTH  [1X08_LOCK]  217.17,165.35 180 top
JP90  1X8 FEMALE PTH  [1X08_LOCK]  199.39,117.09 180 top
JP91  1X10 FEMALE PTH  [1X10_LOCK]  195.58,165.35 180 top
JP92  2X6 FEMALE  [2X6]  242.57,152.65 90 top
JP93  2X6 FEMALE  [2X6]  234.95,165.35 180 top
JP94  2X6 FEMALE  [2X6]  240.03,129.79 270 top
JP95  2X6 FEMALE  [2X6]  242.57,134.87 90 top
JP96  [2X3]  217.17,145.03 270 top
JP97  DNP  [2X5_PTH_SILK_.05]  172.72,133.6 90 top
JP98  2X6 FEMALE  [2X6]  168.91,166.62 180 top
JP99  DNP  [2X5_PTH_SILK_.05]  175.26,131.06 0 top
JP100  MicroB  [USB-B-MICRO-SMD_V03]  135.25,137.41 0 top
JP101  MicroB  [USB-B-MICRO-SMD_V03]  135.25,152.65 0 top
JP102  1x8 FEMALE PTH  [1X08_LOCK]  219.71,117.09 0 top
LOGO1  SFE_LOGO_NAME_FLAME.2_INCH  [SFE_LOGO_NAME_FLAME_.2]  88.9,39.62 0 top
LOGO2  OSHW-LOGOS  [OSHW-LOGO-S]  102.87,34.8 0 top
LOGO3  SFE_LOGO_NAME_FLAME.2_INCH  [SFE_LOGO_NAME_FLAME_.2]  210.82,39.62 0 top
LOGO4  OSHW-LOGOS  [OSHW-LOGO-S]  224.79,34.8 0 top
LOGO5  SFE_LOGO_NAME_FLAME.2_INCH  [SFE_LOGO_NAME_FLAME_.2]  88.9,93.47 0 top
LOGO6  OSHW-LOGOS  [OSHW-LOGO-S]  102.87,88.65 0 top
LOGO7  SFE_LOGO_NAME_FLAME.2_INCH  [SFE_LOGO_NAME_FLAME_.2]  210.82,93.47 0 top
LOGO8  OSHW-LOGOS  [OSHW-LOGO-S]  224.79,88.65 0 top
LOGO9  SFE_LOGO_NAME_FLAME.2_INCH  [SFE_LOGO_NAME_FLAME_.2]  88.9,147.32 0 top
LOGO10  OSHW-LOGOS  [OSHW-LOGO-S]  102.87,142.49 0 top
LOGO11  SFE_LOGO_NAME_FLAME.2_INCH  [SFE_LOGO_NAME_FLAME_.2]  210.82,147.32 0 top
LOGO12  OSHW-LOGOS  [OSHW-LOGO-S]  224.79,142.49 0 top
R1  4.7K  [0603-RES]  59.69,33.53 180 top
R2  4.7K  [0603-RES]  41.91,28.45 90 top
R3  10K  [0603-RES]  24.13,34.8 90 top
R4  10K  [0603-RES]  20.32,46.23 270 top
R5  20k  [0603-RES]  20.32,42.42 90 top
R6  20k  [0603-RES]  26.04,34.8 90 top
R7  2.2k  [0603-RES]  55.88,38.61 0 top
R8  2.2k  [0603-RES]  55.88,40.26 0 top
R9  1K  [0603-RES@1]  49.53,50.04 180 top
R10  1K  [0603-RES@1]  48.9,48.01 0 top
R11  0.27  [0603-RES]  38.73,30.99 270 top
R12  0.27  [0603-RES]  38.73,23.37 270 top
R13  22  [0402-RES]  189.23,20.19 180 top
R14  22  [0402-RES]  189.23,18.92 180 top
R15  22  [0402-RES]  169.29,36.96 0 top
R16  22  [0402-RES]  67.31,20.19 180 top
R17  22  [0402-RES]  67.31,18.92 180 top
R18  22  [0402-RES]  47.37,36.96 0 top
R19  22  [0402-RES]  47.37,38.1 0 top
R20  1K  [0603-RES@1]  49.15,42.04 0 top
R21  1K  [0603-RES@1]  58.8,50.93 180 top
R22  22  [0402-RES]  169.29,38.1 0 top
R23  1K  [0603-RES@1]  171.07,42.04 0 top
R24  1K  [0603-RES@1]  180.72,50.93 180 top
R25  4.7K  [0603-RES]  181.61,33.53 180 top
R26  4.7K  [0603-RES]  163.83,28.45 90 top
R27  10K  [0603-RES]  146.05,34.8 90 top
R28  10K  [0603-RES]  142.24,46.23 270 top
R29  20k  [0603-RES]  142.24,42.42 90 top
R30  20k  [0603-RES]  147.96,34.8 90 top
R31  2.2k  [0603-RES]  177.8,38.61 0 top
R32  2.2k  [0603-RES]  177.8,40.26 0 top
R33  1K  [0603-RES@1]  171.45,50.04 180 top
R34  1K  [0603-RES@1]  170.81,48.01 0 top
R35  0.27  [0603-RES]  160.66,30.99 270 top
R36  0.27  [0603-RES]  160.66,23.37 270 top
R37  22  [0402-RES]  67.31,74.04 180 top
R38  22  [0402-RES]  67.31,72.77 180 top
R39  22  [0402-RES]  47.37,90.81 0 top
R40  22  [0402-RES]  47.37,91.95 0 top
R41  1K  [0603-RES@1]  49.15,95.89 0 top
R42  1K  [0603-RES@1]  58.8,104.78 180 top
R43  4.7K  [0603-RES]  59.69,87.38 180 top
R44  4.7K  [0603-RES]  41.91,82.3 90 top
R45  10K  [0603-RES]  24.13,88.65 90 top
R46  10K  [0603-RES]  20.32,100.08 270 top
R47  20k  [0603-RES]  20.32,96.27 90 top
R48  20k  [0603-RES]  26.04,88.65 90 top
R49  2.2k  [0603-RES]  55.88,92.46 0 top
R50  2.2k  [0603-RES]  55.88,94.11 0 top
R51  1K  [0603-RES@1]  49.53,103.89 180 top
R52  1K  [0603-RES@1]  48.9,101.85 0 top
R53  0.27  [0603-RES]  38.73,84.84 270 top
R54  0.27  [0603-RES]  38.73,77.22 270 top
R55  22  [0402-RES]  189.23,74.04 180 top
R56  22  [0402-RES]  189.23,72.77 180 top
R57  22  [0402-RES]  169.29,90.81 0 top
R58  22  [0402-RES]  169.29,91.95 0 top
R59  1K  [0603-RES@1]  171.07,95.89 0 top
R60  1K  [0603-RES@1]  180.72,104.78 180 top
R61  4.7K  [0603-RES]  181.61,87.38 180 top
R62  4.7K  [0603-RES]  163.83,82.3 90 top
R63  10K  [0603-RES]  146.05,88.65 90 top
R64  10K  [0603-RES]  142.24,100.08 270 top
R65  20k  [0603-RES]  142.24,96.27 90 top
R66  20k  [0603-RES]  147.96,88.65 90 top
R67  2.2k  [0603-RES]  177.8,92.46 0 top
R68  2.2k  [0603-RES]  177.8,94.11 0 top
R69  1K  [0603-RES@1]  171.45,103.89 180 top
R70  1K  [0603-RES@1]  170.81,101.85 0 top
R71  0.27  [0603-RES]  160.66,84.84 270 top
R72  0.27  [0603-RES]  160.66,77.22 270 top
R73  22  [0402-RES]  67.31,127.89 180 top
R74  22  [0402-RES]  67.31,126.62 180 top
R75  22  [0402-RES]  47.37,144.65 0 top
R76  22  [0402-RES]  47.37,145.8 0 top
R77  1K  [0603-RES@1]  49.15,149.73 0 top
R78  1K  [0603-RES@1]  58.8,158.62 180 top
R79  4.7K  [0603-RES]  59.69,141.22 180 top
R80  4.7K  [0603-RES]  41.91,136.14 90 top
R81  10K  [0603-RES]  24.13,142.49 90 top
R82  10K  [0603-RES]  20.32,153.92 270 top
R83  20k  [0603-RES]  20.32,150.11 90 top
R84  20k  [0603-RES]  26.04,142.49 90 top
R85  2.2k  [0603-RES]  55.88,146.3 0 top
R86  2.2k  [0603-RES]  55.88,147.96 0 top
R87  1K  [0603-RES@1]  49.53,157.73 180 top
R88  1K  [0603-RES@1]  48.9,155.7 0 top
R89  0.27  [0603-RES]  38.73,138.68 270 top
R90  0.27  [0603-RES]  38.73,131.06 270 top
R91  22  [0402-RES]  189.23,127.89 180 top
R92  22  [0402-RES]  189.23,126.62 180 top
R93  22  [0402-RES]  169.29,144.65 0 top
R94  22  [0402-RES]  169.29,145.8 0 top
R95  1K  [0603-RES@1]  171.07,149.73 0 top
R96  1K  [0603-RES@1]  180.72,158.62 180 top
R97  4.7K  [0603-RES]  181.61,141.22 180 top
R98  4.7K  [0603-RES]  163.83,136.14 90 top
R99  10K  [0603-RES]  146.05,142.49 90 top
R100  10K  [0603-RES]  142.24,153.92 270 top
R101  20k  [0603-RES]  142.24,150.11 90 top
R102  20k  [0603-RES]  147.96,142.49 90 top
R103  2.2k  [0603-RES]  177.8,146.3 0 top
R104  2.2k  [0603-RES]  177.8,147.96 0 top
R105  1K  [0603-RES@1]  171.45,157.73 180 top
R106  1K  [0603-RES@1]  170.81,155.7 0 top
R107  0.27  [0603-RES]  160.66,138.68 270 top
R108  0.27  [0603-RES]  160.66,131.06 270 top
S1  SPST-MOM  [TACTILE-SWITCH-SMD]  17.78,37.34 180 top
S2  SPST-MOM  [TACTILE-SWITCH-SMD]  100.33,20.83 0 top
S3  SPDT  [SWITCH-SPDT_LOCK.007S]  31.75,11.94 90 top
S4  SPDT  [SWITCH-SPDT_LOCK.007S]  31.75,17.02 90 top
S5  SPST-MOM  [TACTILE-SWITCH-SMD]  24.13,42.55 90 top
S6  SPST-MOM  [TACTILE-SWITCH-SMD]  111.76,23.37 180 top
S7  SPST-MOM  [TACTILE-SWITCH-SMD]  139.7,37.34 180 top
S8  SPST-MOM  [TACTILE-SWITCH-SMD]  222.25,20.83 0 top
S9  SPDT  [SWITCH-SPDT_LOCK.007S]  153.67,11.94 90 top
S10  SPDT  [SWITCH-SPDT_LOCK.007S]  153.67,17.02 90 top
S11  SPST-MOM  [TACTILE-SWITCH-SMD]  146.05,42.55 90 top
S12  SPST-MOM  [TACTILE-SWITCH-SMD]  233.68,23.37 180 top
S13  SPST-MOM  [TACTILE-SWITCH-SMD]  17.78,91.19 180 top
S14  SPST-MOM  [TACTILE-SWITCH-SMD]  100.33,74.68 0 top
S15  SPDT  [SWITCH-SPDT_LOCK.007S]  31.75,65.79 90 top
S16  SPDT  [SWITCH-SPDT_LOCK.007S]  31.75,70.87 90 top
S17  SPST-MOM  [TACTILE-SWITCH-SMD]  24.13,96.39 90 top
S18  SPST-MOM  [TACTILE-SWITCH-SMD]  111.76,77.22 180 top
S19  SPST-MOM  [TACTILE-SWITCH-SMD]  139.7,91.19 180 top
S20  SPST-MOM  [TACTILE-SWITCH-SMD]  222.25,74.68 0 top
S21  SPDT  [SWITCH-SPDT_LOCK.007S]  153.67,65.79 90 top
S22  SPDT  [SWITCH-SPDT_LOCK.007S]  153.67,70.87 90 top
S23  SPST-MOM  [TACTILE-SWITCH-SMD]  146.05,96.39 90 top
S24  SPST-MOM  [TACTILE-SWITCH-SMD]  233.68,77.22 180 top
S25  SPST-MOM  [TACTILE-SWITCH-SMD]  17.78,145.03 180 top
S26  SPST-MOM  [TACTILE-SWITCH-SMD]  100.33,128.52 0 top
S27  SPDT  [SWITCH-SPDT_LOCK.007S]  31.75,119.63 90 top
S28  SPDT  [SWITCH-SPDT_LOCK.007S]  31.75,124.71 90 top
S29  SPST-MOM  [TACTILE-SWITCH-SMD]  24.13,150.24 90 top
S30  SPST-MOM  [TACTILE-SWITCH-SMD]  111.76,131.06 180 top
S31  SPST-MOM  [TACTILE-SWITCH-SMD]  139.7,145.03 180 top
S32  SPST-MOM  [TACTILE-SWITCH-SMD]  222.25,128.52 0 top
S33  SPDT  [SWITCH-SPDT_LOCK.007S]  153.67,119.63 90 top
S34  SPDT  [SWITCH-SPDT_LOCK.007S]  153.67,124.71 90 top
S35  SPST-MOM  [TACTILE-SWITCH-SMD]  146.05,150.24 90 top
S36  SPST-MOM  [TACTILE-SWITCH-SMD]  233.68,131.06 180 top
SJ1  JUMPER-PAD-2-NC_BY_PASTE  [PAD-JUMPER-2-NC_BY_PASTE_YES_SILK]  29.59,25.91 0 top
SJ2  JUMPER-PAD-2-NOYES_SILK  [PAD-JUMPER-2-NO_YES_SILK]  27.05,53.09 0 top
SJ3  JUMPER-PAD-2-NO  [PAD-JUMPER-2-NO_NO_SILK]  84.45,40.26 0 top
SJ4  JUMPER-PAD-2-NO  [PAD-JUMPER-2-NO_NO_SILK]  85.6,42.67 0 top
SJ5  JUMPER-PAD-2-NO  [PAD-JUMPER-2-NO_NO_SILK]  80.14,42.93 0 top
SJ6  JUMPER-PAD-2-NO  [PAD-JUMPER-2-NO_NO_SILK]  54.61,50.67 180 top
SJ7  JUMPER-PAD-2-NO  [PAD-JUMPER-2-NO_NO_SILK]  54.61,48.77 180 top
SJ8  JUMPER-PAD-2-NC_BY_PASTE  [PAD-JUMPER-2-NC_BY_PASTE_YES_SILK]  151.51,25.91 0 top
SJ9  JUMPER-PAD-2-NOYES_SILK  [PAD-JUMPER-2-NO_YES_SILK]  148.97,53.09 0 top
SJ10  JUMPER-PAD-2-NO  [PAD-JUMPER-2-NO_NO_SILK]  206.38,40.26 0 top
SJ11  JUMPER-PAD-2-NO  [PAD-JUMPER-2-NO_NO_SILK]  207.52,42.67 0 top
SJ12  JUMPER-PAD-2-NO  [PAD-JUMPER-2-NO_NO_SILK]  202.06,42.93 0 top
SJ13  JUMPER-PAD-2-NO  [PAD-JUMPER-2-NO_NO_SILK]  176.53,50.67 180 top
SJ14  JUMPER-PAD-2-NO  [PAD-JUMPER-2-NO_NO_SILK]  176.53,48.77 180 top
SJ15  JUMPER-PAD-2-NC_BY_PASTE  [PAD-JUMPER-2-NC_BY_PASTE_YES_SILK]  29.59,79.76 0 top
SJ16  JUMPER-PAD-2-NOYES_SILK  [PAD-JUMPER-2-NO_YES_SILK]  27.05,106.93 0 top
SJ17  JUMPER-PAD-2-NO  [PAD-JUMPER-2-NO_NO_SILK]  84.45,94.11 0 top
SJ18  JUMPER-PAD-2-NO  [PAD-JUMPER-2-NO_NO_SILK]  85.6,96.52 0 top
SJ19  JUMPER-PAD-2-NO  [PAD-JUMPER-2-NO_NO_SILK]  80.14,96.77 0 top
SJ20  JUMPER-PAD-2-NO  [PAD-JUMPER-2-NO_NO_SILK]  54.61,104.52 180 top
SJ21  JUMPER-PAD-2-NO  [PAD-JUMPER-2-NO_NO_SILK]  54.61,102.62 180 top
SJ22  JUMPER-PAD-2-NC_BY_PASTE  [PAD-JUMPER-2-NC_BY_PASTE_YES_SILK]  151.51,79.76 0 top
SJ23  JUMPER-PAD-2-NOYES_SILK  [PAD-JUMPER-2-NO_YES_SILK]  148.97,106.93 0 top
SJ24  JUMPER-PAD-2-NO  [PAD-JUMPER-2-NO_NO_SILK]  206.38,94.11 0 top
SJ25  JUMPER-PAD-2-NO  [PAD-JUMPER-2-NO_NO_SILK]  207.52,96.52 0 top
SJ26  JUMPER-PAD-2-NO  [PAD-JUMPER-2-NO_NO_SILK]  202.06,96.77 0 top
SJ27  JUMPER-PAD-2-NO  [PAD-JUMPER-2-NO_NO_SILK]  176.53,104.52 180 top
SJ28  JUMPER-PAD-2-NO  [PAD-JUMPER-2-NO_NO_SILK]  176.53,102.62 180 top
SJ29  JUMPER-PAD-2-NC_BY_PASTE  [PAD-JUMPER-2-NC_BY_PASTE_YES_SILK]  29.59,133.6 0 top
SJ30  JUMPER-PAD-2-NOYES_SILK  [PAD-JUMPER-2-NO_YES_SILK]  27.05,160.78 0 top
SJ31  JUMPER-PAD-2-NO  [PAD-JUMPER-2-NO_NO_SILK]  84.45,147.96 0 top
SJ32  JUMPER-PAD-2-NO  [PAD-JUMPER-2-NO_NO_SILK]  85.6,150.37 0 top
SJ33  JUMPER-PAD-2-NO  [PAD-JUMPER-2-NO_NO_SILK]  80.14,150.62 0 top
SJ34  JUMPER-PAD-2-NO  [PAD-JUMPER-2-NO_NO_SILK]  54.61,158.37 180 top
SJ35  JUMPER-PAD-2-NO  [PAD-JUMPER-2-NO_NO_SILK]  54.61,156.46 180 top
SJ36  JUMPER-PAD-2-NC_BY_PASTE  [PAD-JUMPER-2-NC_BY_PASTE_YES_SILK]  151.51,133.6 0 top
SJ37  JUMPER-PAD-2-NOYES_SILK  [PAD-JUMPER-2-NO_YES_SILK]  148.97,160.78 0 top
SJ38  JUMPER-PAD-2-NO  [PAD-JUMPER-2-NO_NO_SILK]  206.38,147.96 0 top
SJ39  JUMPER-PAD-2-NO  [PAD-JUMPER-2-NO_NO_SILK]  207.52,150.37 0 top
SJ40  JUMPER-PAD-2-NO  [PAD-JUMPER-2-NO_NO_SILK]  202.06,150.62 0 top
SJ41  JUMPER-PAD-2-NO  [PAD-JUMPER-2-NO_NO_SILK]  176.53,158.37 180 top
SJ42  JUMPER-PAD-2-NO  [PAD-JUMPER-2-NO_NO_SILK]  176.53,156.46 180 top
STANDOFF1  STAND-OFF  [STAND-OFF]  13.97,9.4 0 top
STANDOFF2  STAND-OFF  [STAND-OFF]  13.97,57.66 0 top
STANDOFF3  STAND-OFF  [STAND-OFF]  125.73,57.66 0 top
STANDOFF4  STAND-OFF  [STAND-OFF]  125.73,9.4 0 top
STANDOFF5  STAND-OFF  [STAND-OFF]  135.89,9.4 0 top
STANDOFF6  STAND-OFF  [STAND-OFF]  135.89,57.66 0 top
STANDOFF7  STAND-OFF  [STAND-OFF]  247.65,57.66 0 top
STANDOFF8  STAND-OFF  [STAND-OFF]  247.65,9.4 0 top
STANDOFF9  STAND-OFF  [STAND-OFF]  13.97,63.25 0 top
STANDOFF10  STAND-OFF  [STAND-OFF]  13.97,111.51 0 top
STANDOFF11  STAND-OFF  [STAND-OFF]  125.73,111.51 0 top
STANDOFF12  STAND-OFF  [STAND-OFF]  125.73,63.25 0 top
STANDOFF13  STAND-OFF  [STAND-OFF]  135.89,63.25 0 top
STANDOFF14  STAND-OFF  [STAND-OFF]  135.89,111.51 0 top
STANDOFF15  STAND-OFF  [STAND-OFF]  247.65,111.51 0 top
STANDOFF16  STAND-OFF  [STAND-OFF]  247.65,63.25 0 top
STANDOFF17  STAND-OFF  [STAND-OFF]  13.97,117.09 0 top
STANDOFF18  STAND-OFF  [STAND-OFF]  13.97,165.35 0 top
STANDOFF19  STAND-OFF  [STAND-OFF]  125.73,165.35 0 top
STANDOFF20  STAND-OFF  [STAND-OFF]  125.73,117.09 0 top
STANDOFF21  STAND-OFF  [STAND-OFF]  135.89,117.09 0 top
STANDOFF22  STAND-OFF  [STAND-OFF]  135.89,165.35 0 top
STANDOFF23  STAND-OFF  [STAND-OFF]  247.65,165.35 0 top
STANDOFF24  STAND-OFF  [STAND-OFF]  247.65,117.09 0 top
U1  CY8C5888AXI-LP096  [TQFP-100-14X14MM]  72.39,33.53 0 top
U2  MIC5219 5V  [SOT23-5]  35.56,21.84 270 top
U3  MIC5219 3.3V  [SOT23-5]  35.56,29.46 270 top
U4  2A/20V  [SOT26]  54.61,43.69 90 top
U5  CY8C5888AXI-LP096  [TQFP-100-14X14MM]  194.31,33.53 0 top
U6  CY8C5868LTI-LP039  [QFN-68]  161.29,39.88 90 top
U7  CY8C5868LTI-LP039  [QFN-68]  39.37,39.88 90 top
U8  MIC5219 5V  [SOT23-5]  157.48,21.84 270 top
U9  MIC5219 3.3V  [SOT23-5]  157.48,29.46 270 top
U10  2A/20V  [SOT26]  176.53,43.69 90 top
U11  CY8C5888AXI-LP096  [TQFP-100-14X14MM]  72.39,87.38 0 top
U12  CY8C5868LTI-LP039  [QFN-68]  39.37,93.73 90 top
U13  MIC5219 5V  [SOT23-5]  35.56,75.69 270 top
U14  MIC5219 3.3V  [SOT23-5]  35.56,83.31 270 top
U15  2A/20V  [SOT26]  54.61,97.54 90 top
U16  CY8C5888AXI-LP096  [TQFP-100-14X14MM]  194.31,87.38 0 top
U17  CY8C5868LTI-LP039  [QFN-68]  161.29,93.73 90 top
U18  MIC5219 5V  [SOT23-5]  157.48,75.69 270 top
U19  MIC5219 3.3V  [SOT23-5]  157.48,83.31 270 top
U20  2A/20V  [SOT26]  176.53,97.54 90 top
U21  CY8C5888AXI-LP096  [TQFP-100-14X14MM]  72.39,141.22 0 top
U22  CY8C5868LTI-LP039  [QFN-68]  39.37,147.57 90 top
U23  MIC5219 5V  [SOT23-5]  35.56,129.54 270 top
U24  MIC5219 3.3V  [SOT23-5]  35.56,137.16 270 top
U25  2A/20V  [SOT26]  54.61,151.38 90 top
U26  CY8C5888AXI-LP096  [TQFP-100-14X14MM]  194.31,141.22 0 top
U27  CY8C5868LTI-LP039  [QFN-68]  161.29,147.57 90 top
U28  MIC5219 5V  [SOT23-5]  157.48,129.54 270 top
U29  MIC5219 3.3V  [SOT23-5]  157.48,137.16 270 top
U30  2A/20V  [SOT26]  176.53,151.38 90 top
Y1  32.768kHz  [TC26H]  89.53,27.94 0 top
Y2  [HC49US]  74.93,18.29 0 top
Y3  32.768kHz  [TC26H]  211.46,27.94 0 top
Y4  [HC49US]  196.85,18.29 0 top
Y5  32.768kHz  [TC26H]  89.53,81.79 0 top
Y6  [HC49US]  74.93,72.14 0 top
Y7  32.768kHz  [TC26H]  211.46,81.79 0 top
Y8  [HC49US]  196.85,72.14 0 top
Y9  32.768kHz  [TC26H]  89.53,135.64 0 top
Y10  [HC49US]  74.93,125.98 0 top
Y11  32.768kHz  [TC26H]  211.46,135.64 0 top
Y12  [HC49US]  196.85,125.98 0 top

## Library data of the parts
C1 C2 C4 C5 C7 C8 C10 C16 C17 C19 C20 C39 C42 C43 C48-C51 C73-C75 C78 C79 C84-C87 C109-C111 C114 C115 C120-C123 C145-C147 C150 C151 C156-C159 C181-C183 C186 C187 C192-C195 = SparkFun-Capacitors; PROD_ID: CAP-12417
C3 C6 C9 C11 C13 C15 C21-C23 C25 C27 C29-C36 C40 C41 C44-C47 C52-C58 C63-C68 C76 C77 C80-C83 C88-C94 C99-C104 C112 C113 C116-C119 C124-C130 C135-C140 C148 C149 C152-C155 C160-C166 C171-C176 C184 C185 C188-C191 C196-C202 C207-C212 = SparkFun-Capacitors; PROD_ID: CAP-12416
C12 C14 C18 C24 C59 C60 C69 C70 C95 C96 C105 C106 C131 C132 C141 C142 C167 C168 C177 C178 C203 C204 C213 C214 = SparkFun-Capacitors
C26 C28 C61 C62 C97 C98 C133 C134 C169 C170 C205 C206 = SparkFun-Capacitors; PROD_ID: CAP-11330
C37 C71 C107 C143 C179 C215 = SparkFun-Capacitors; PROD_ID: CAP-00868
C38 C72 C108 C144 C180 C216 = SparkFun-Capacitors; PROD_ID: CAP-00810
D1-D4 D7-D10 D13-D16 D19-D22 D25-D28 D31-D34 = SparkFun-DiscreteSemi; PROD_ID: DIO-08053
D5 D6 D11 D12 D17 D18 D23 D24 D29 D30 D35 D36 = SparkFun-LED; PROD_ID: DIO-00819
E$1 = SparkFun-Retired
E$7 E$8 FID1-FID12 LOGO1-LOGO12 = SparkFun-Aesthetics
JP1 JP2 JP32 JP33 JP49 JP50 JP66 JP67 JP83 JP84 JP100 JP101 = SparkFun-Connectors; PROD_ID: CONN-11752
JP3 JP16 JP35 JP52 JP69 JP86 = SparkFun-Connectors; PROD_ID: CONN-09863; SKU: PRT-09914
JP4 JP20 JP37 JP54 JP71 JP88 = SparkFun-Connectors; PROD_ID: CONN-08437
JP5 JP6 JP10 JP21 JP22 JP34 JP38 JP39 JP51 JP55 JP56 JP68 JP72 JP73 JP85 JP89 JP90 JP102 = SparkFun-Connectors; PROD_ID: CONN-08438
JP7 JP23 JP40 JP57 JP74 JP91 = SparkFun-Connectors; PROD_ID: CONN-11563
JP8 JP9 JP11 JP12 JP15 JP24-JP27 JP30 JP41-JP44 JP47 JP58-JP61 JP64 JP75-JP78 JP81 JP92-JP95 JP98 = SparkFun-Connectors; PROD_ID: CONN-12423
JP13 JP28 JP45 JP62 JP79 JP96 = SparkFun-Connectors; PROD_ID: CONN-09701
JP14 JP17 JP29 JP31 JP46 JP48 JP63 JP65 JP80 JP82 JP97 JP99 = SparkFun-Connectors
JP18 JP19 JP36 JP53 JP70 JP87 = SparkFun-Connectors; PROD_ID: CONN-08197; SF_ID: PRT-00119
R1 R2 R25 R26 R43 R44 R61 R62 R79 R80 R97 R98 = SparkFun-Resistors; PROD_ID: RES-07857
R3 R4 R27 R28 R45 R46 R63 R64 R81 R82 R99 R100 = SparkFun-Resistors; PROD_ID: RES-00824
R5 R6 R29 R30 R47 R48 R65 R66 R83 R84 R101 R102 = SparkFun-Resistors; PROD_ID: RES-09383
R7 R8 R31 R32 R49 R50 R67 R68 R85 R86 R103 R104 = SparkFun-Resistors; PROD_ID: RES-08272
R9 R10 R20 R21 R23 R24 R33 R34 R41 R42 R51 R52 R59 R60 R69 R70 R77 R78 R87 R88 R95 R96 R105 R106 = SparkFun-Resistors; PROD_ID: RES-07856
R11 R12 R35 R36 R53 R54 R71 R72 R89 R90 R107 R108 = SparkFun-Resistors; PROD_ID: RES-08787
R13-R19 R22 R37-R40 R55-R58 R73-R76 R91-R94 = SparkFun-Resistors; PROD_ID: RES-12427
S1 S2 S5-S8 S11-S14 S17-S20 S23-S26 S29-S32 S35 S36 = SparkFun-Electromechanical; PROD_ID: SWCH-08247
S3 S4 S9 S10 S15 S16 S21 S22 S27 S28 S33 S34 = SparkFun-Electromechanical; PROD_ID: SWCH-08261
SJ1-SJ42 = SparkFun-Passives
STANDOFF1-STANDOFF24 = SparkFun-Electromechanical
U1 U5 U11 U16 U21 U26 = SparkFun-DigitalIC; PROD_ID: IC-12190
U2 U8 U13 U18 U23 U28 = SparkFun-PowerIC; PROD_ID: VREG-10107
U3 U9 U14 U19 U24 U29 = SparkFun-PowerIC; PROD_ID: VREG-09872
U4 U10 U15 U20 U25 U30 = SparkFun-DiscreteSemi; PROD_ID: TRAN-12444
U6 U7 U12 U17 U22 U27 = SparkFun-DigitalIC; PROD_ID: IC-12391
Y1 Y3 Y5 Y7 Y9 Y11 = SparkFun-FreqCtrl; PROD_ID: XTAL-10112
Y2 Y4 Y6 Y8 Y10 Y12 = SparkFun-FreqCtrl